# Altium PCB pdb v2.PcbDoc (part 1 of 2)
Units mm, origin at the board's own origin, x right, y up, seen from the top; angles counter-clockwise.
Board outline 131 x 84.21 mm, 4 copper layers (Top Layer, GND, PWR, Bottom Layer); 111 components, 116 nets, 518 pads, 333 vias.
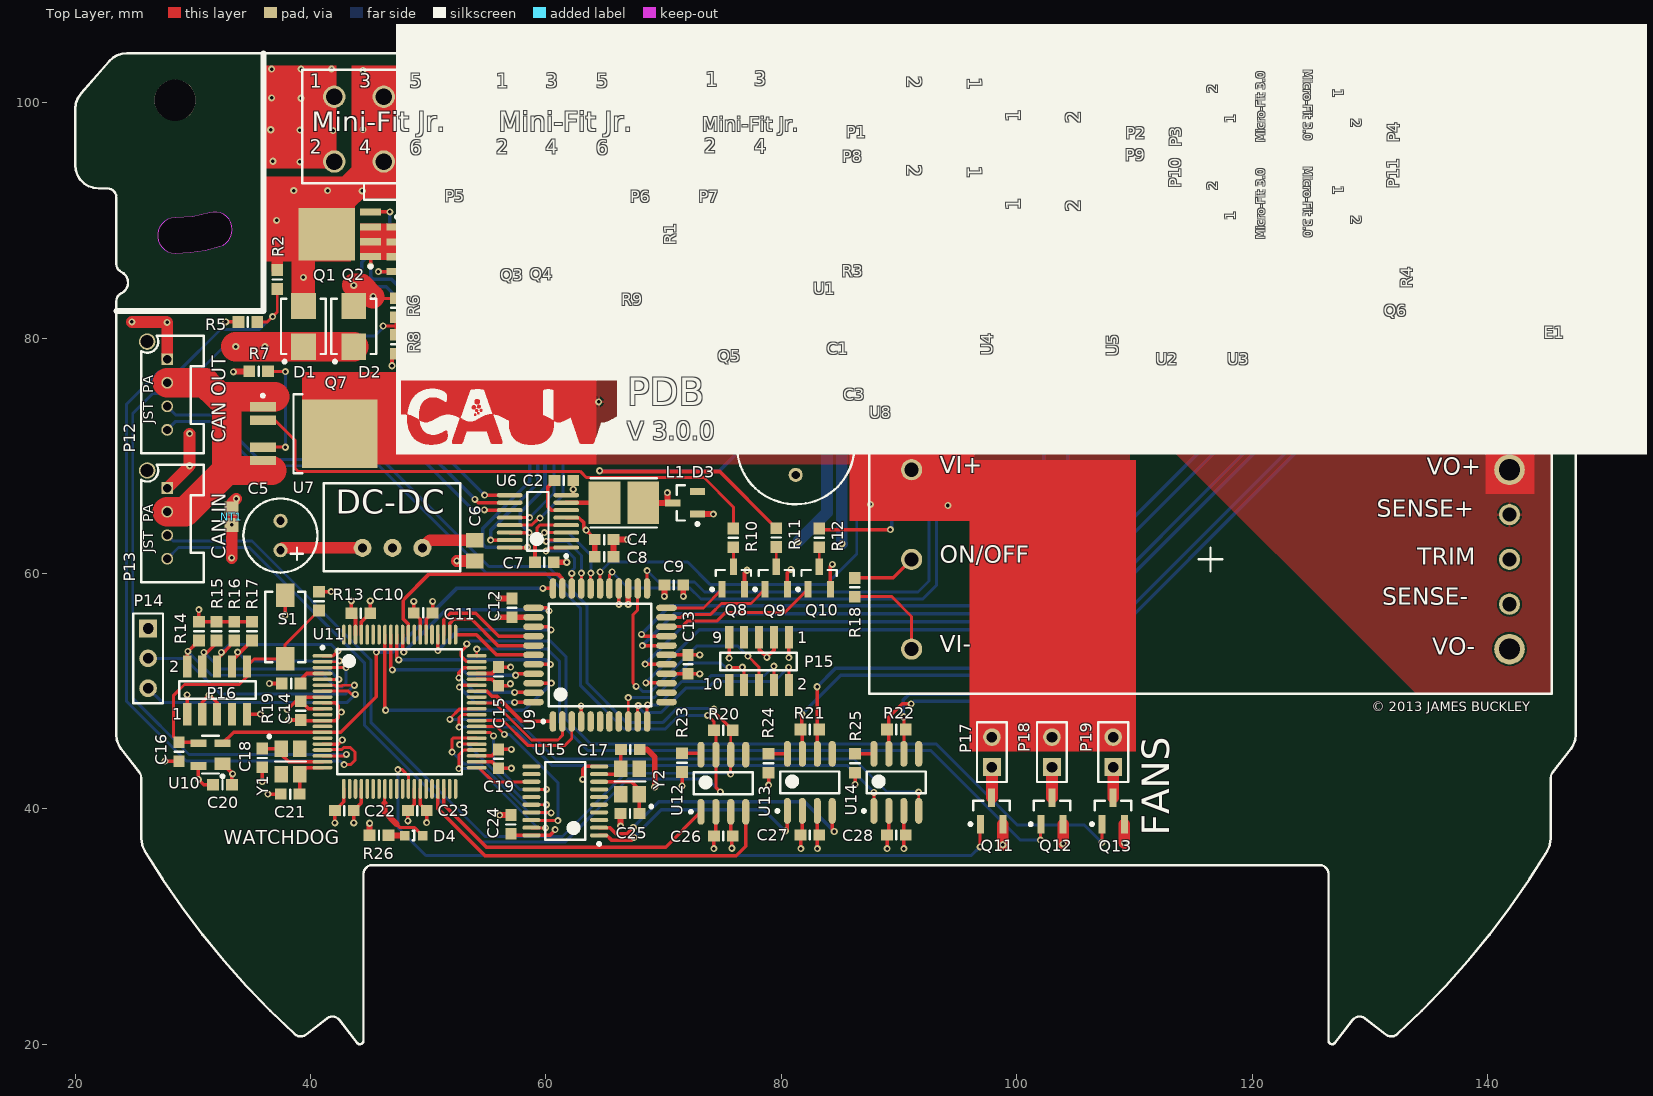
[diagram p0: Top Layer view]
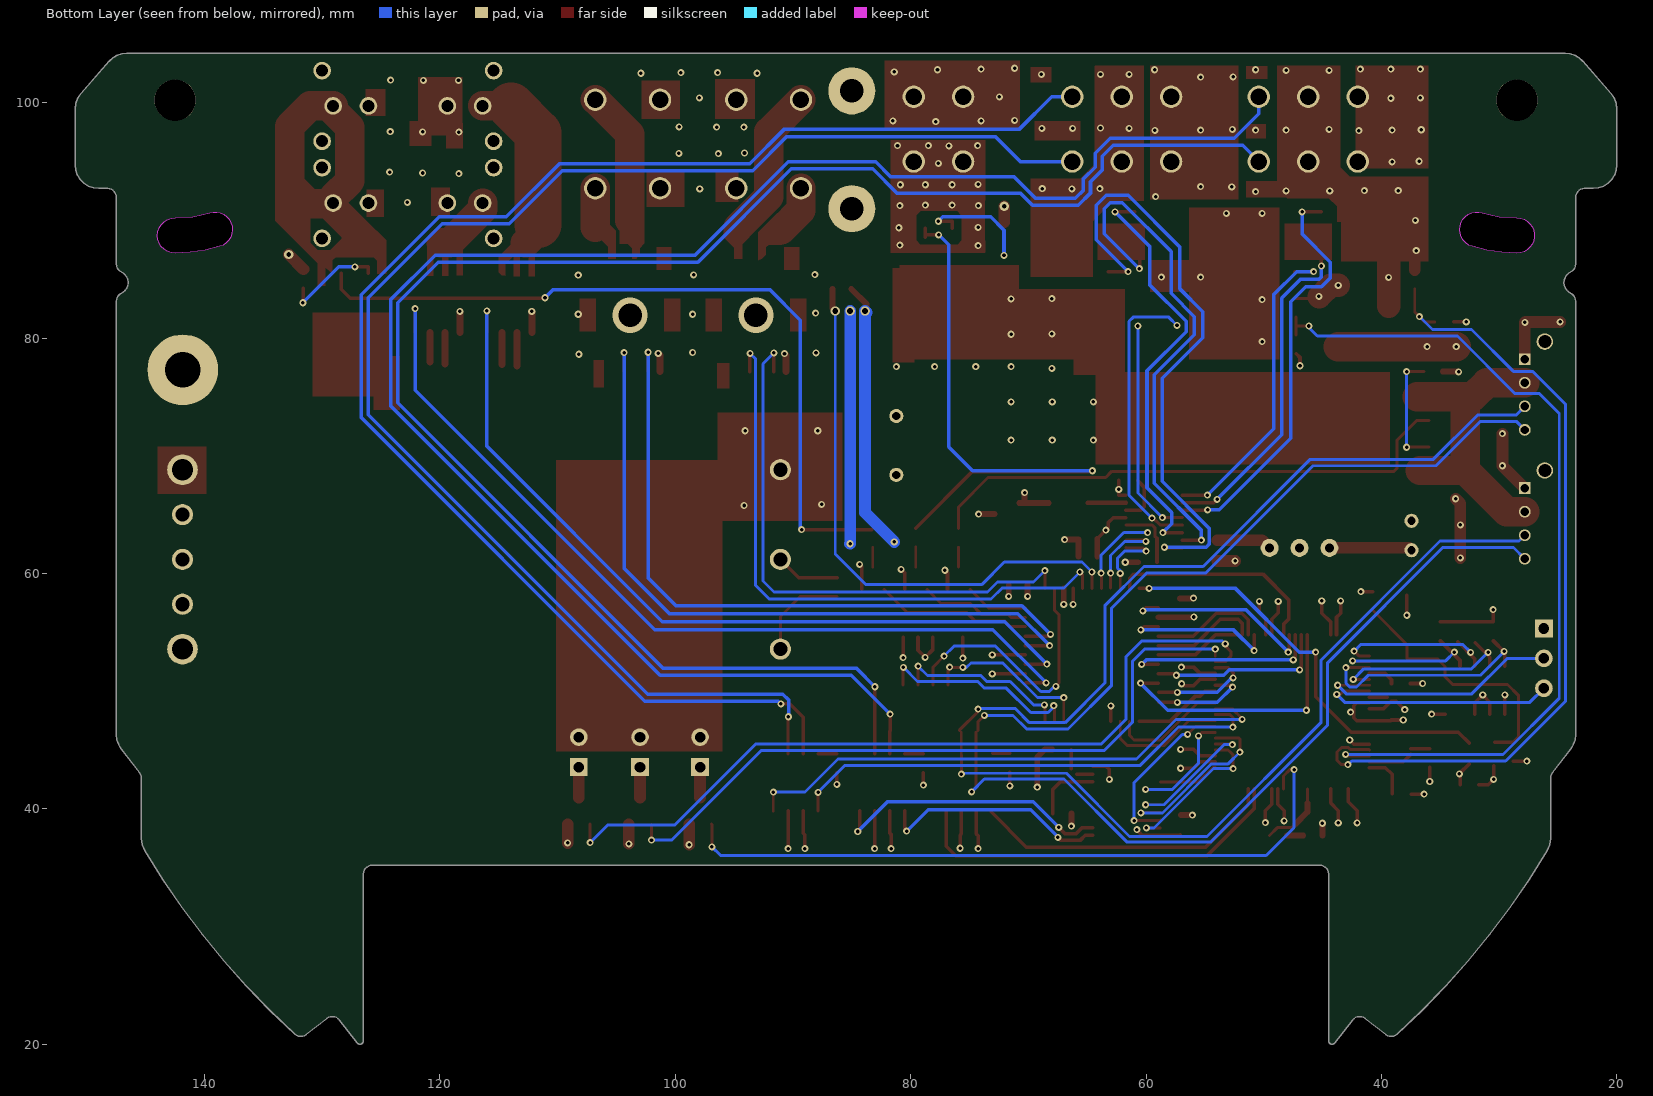
[diagram p1: Bottom Layer view, seen from below]
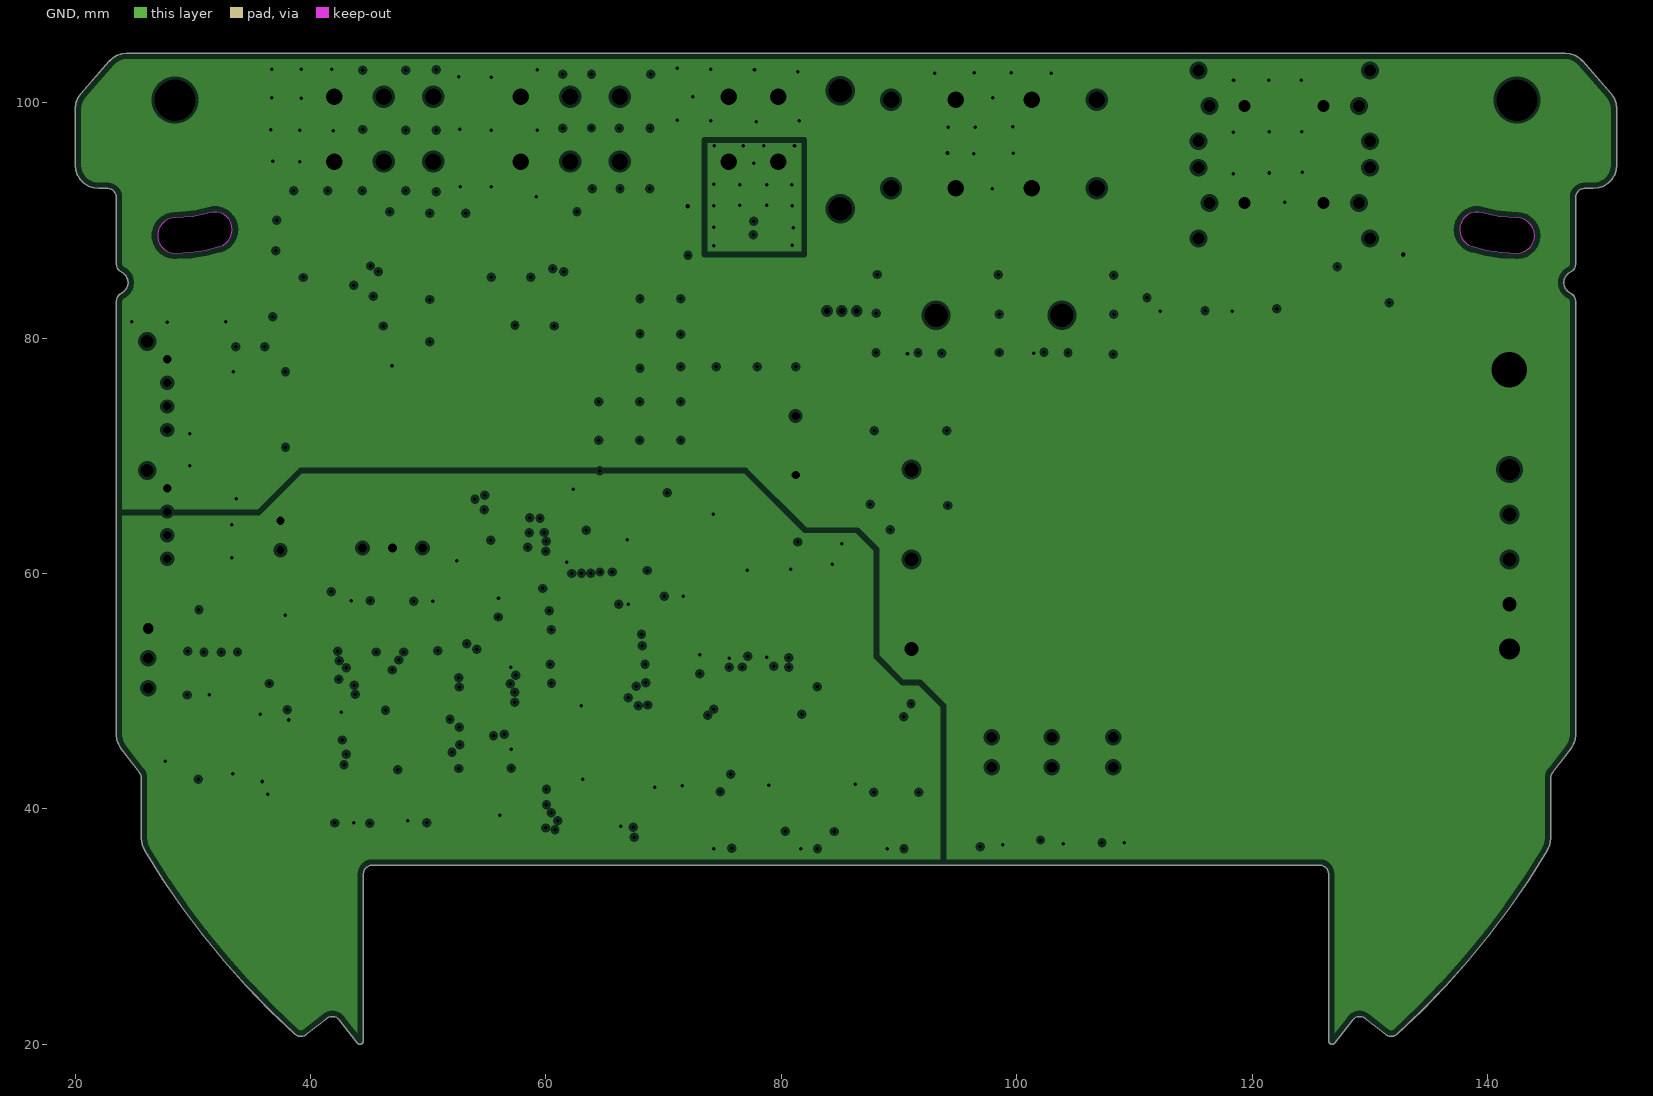
[diagram p2: GND, clearances drawn from the general rule]
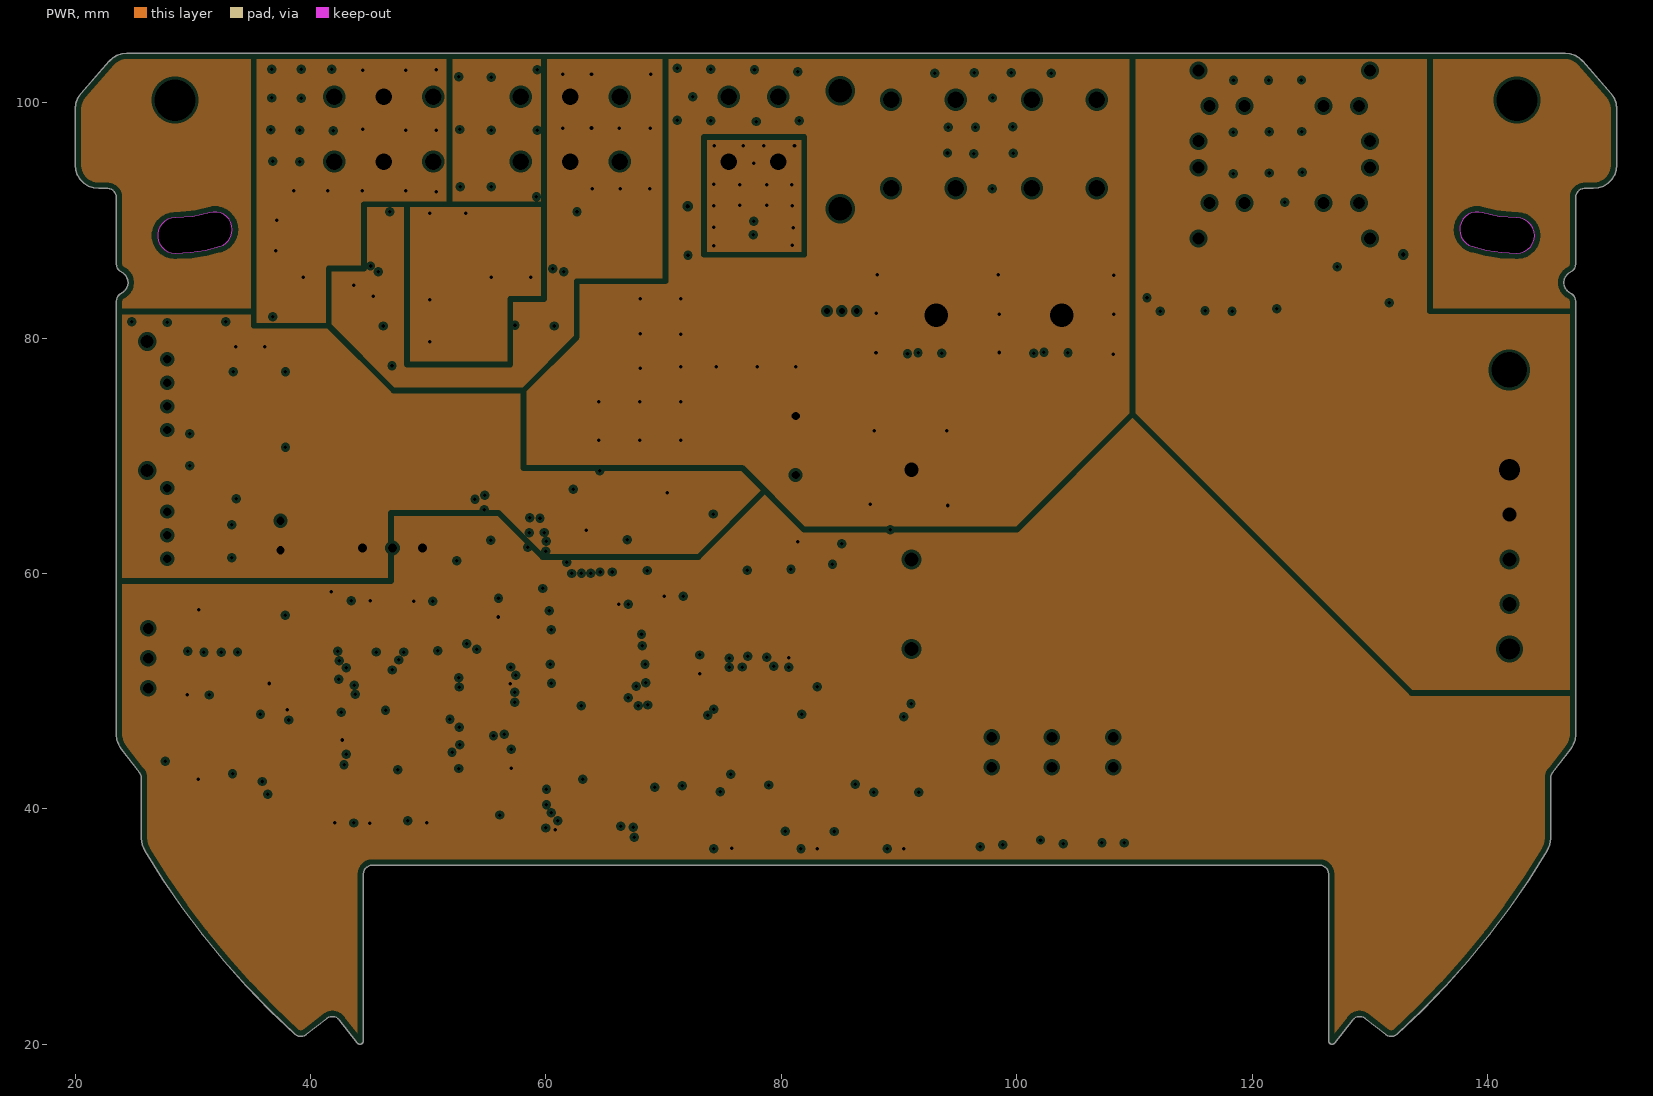
[diagram p3: PWR, clearances drawn from the general rule]

## Layer stack, top to bottom
Top Layer: signal copper 0.0356
Dielectric: core 0.32, FR-4, Dk 4.8
GND: plane copper 0.0356, net (Multiple Nets)
Dielectric: prepreg 0.32, FR-4, Dk 4.8
PWR: plane copper 0.0356, net (Multiple Nets)
Dielectric: core 0.32, FR-4, Dk 4.8
Bottom Layer: signal copper 0.0356

## Board outline
22.902,103.53 23.215,103.818 23.581,104.034 23.985,104.167 24.408,104.213 146.592,104.213 147.015,104.167 147.419,104.034 147.785,103.818 148.098,103.53 150.505,100.778 150.775,100.383 150.943,99.936 151,99.461 151,94.713 150.95,94.268 150.802,93.845 150.564,93.466 150.247,93.149 149.868,92.911 149.445,92.763 149,92.713 148.25,92.713 148.083,92.694 147.925,92.638 147.782,92.549 147.664,92.43 147.574,92.288 147.519,92.13 147.5,91.963 147.5,86.294 147.481,86.126 147.425,85.967 147.335,85.824 147.215,85.705 147.071,85.616 146.896,85.51 146.747,85.37 146.629,85.203 146.547,85.015 146.505,84.815 146.505,84.61 146.547,84.41 146.629,84.222 146.747,84.055 146.896,83.915 147.071,83.809 147.215,83.72 147.335,83.601 147.425,83.459 147.481,83.299 147.5,83.132 147.5,46.308 147.452,45.871 147.31,45.456 147.08,45.082 145.535,43.091 145.449,42.95 145.396,42.795 145.378,42.631 145.378,37.48 145.305,36.946 145.093,36.45 143.556,34.005 141.918,31.626 140.183,29.318 138.354,27.083 136.433,24.926 134.425,22.85 132.332,20.86 132.19,20.759 132.028,20.692 131.856,20.665 131.682,20.679 131.516,20.732 131.366,20.822 129.599,22.193 129.455,22.281 129.296,22.334 129.129,22.351 128.962,22.33 128.805,22.272 128.664,22.181 128.546,22.061 127.037,20.115 126.994,20.07 126.943,20.035 126.886,20.012 126.825,20 126.763,20.001 126.703,20.015 126.647,20.041 126.597,20.078 126.556,20.125 126.525,20.178 126.506,20.237 126.5,20.299 126.5,34.463 126.481,34.63 126.426,34.788 126.336,34.93 126.218,35.049 126.075,35.138 125.917,35.194 125.75,35.213 45.25,35.213 45.083,35.194 44.925,35.138 44.782,35.049 44.664,34.93 44.574,34.788 44.519,34.63 44.5,34.463 44.5,20.299 44.494,20.237 44.475,20.178 44.444,20.125 44.403,20.078 44.353,20.041 44.297,20.015 44.237,20.001 44.175,20 44.114,20.012 44.057,20.035 44.006,20.07 43.963,20.115 42.453,22.061 42.336,22.181 42.195,22.272 42.038,22.33 41.871,22.351 41.704,22.334 41.545,22.281 41.401,22.193 39.634,20.822 39.484,20.732 39.318,20.679 39.144,20.665 38.972,20.692 38.81,20.759 38.668,20.86 36.575,22.85 34.567,24.926 32.646,27.083 30.817,29.318 29.082,31.626 27.444,34.005 25.907,36.45 25.695,36.946 25.622,37.48 25.622,42.631 25.604,42.795 25.551,42.95 25.465,43.091 23.92,45.082 23.69,45.456 23.548,45.871 23.5,46.308 23.5,83.132 23.519,83.299 23.575,83.459 23.665,83.601 23.785,83.72 23.929,83.809 24.12,83.928 24.28,84.086 24.4,84.277 24.475,84.489 24.5,84.713 24.475,84.936 24.4,85.149 24.28,85.339 24.12,85.497 23.929,85.616 23.785,85.705 23.665,85.824 23.575,85.967 23.519,86.126 23.5,86.294 23.5,91.963 23.481,92.13 23.426,92.288 23.336,92.43 23.218,92.549 23.075,92.638 22.917,92.694 22.75,92.713 22,92.713 21.555,92.763 21.132,92.911 20.753,93.149 20.436,93.466 20.198,93.845 20.05,94.268 20,94.713 20,99.461 20.057,99.936 20.225,100.383 20.495,100.778
cut-out: 28.5,90.213 28.188,90.18 27.89,90.083 27.618,89.926 27.385,89.716 27.201,89.463 27.073,89.176 27.008,88.869 27.008,88.556 27.073,88.249 27.201,87.963 27.385,87.709 27.618,87.499 27.89,87.342 28.188,87.245 28.5,87.213 29.784,87.276 31.055,87.466 32.301,87.781 32.593,87.905 32.853,88.089 33.068,88.323 33.229,88.597 33.329,88.899 33.362,89.215 33.33,89.524 33.235,89.82 33.081,90.09 32.875,90.322 32.625,90.507 32.342,90.636 32.039,90.705 31.729,90.709 31.424,90.65 29.978,90.323
cut-out: 142.5,87.213 142.834,87.25 143.151,87.361 143.435,87.54 143.673,87.777 143.851,88.062 143.962,88.379 144,88.713 143.962,89.046 143.851,89.363 143.673,89.648 143.435,89.885 143.151,90.064 142.834,90.175 142.5,90.213 141.022,90.323 139.576,90.65 139.268,90.709 138.955,90.704 138.649,90.633 138.365,90.501 138.115,90.312 137.909,90.076 137.757,89.801 137.665,89.501 137.638,89.189 137.676,88.878 137.778,88.581 137.94,88.312 138.154,88.083 138.41,87.903 138.699,87.781 139.945,87.466 141.216,87.276

## Design rules (kind name [scope] priority, off if disabled: settings)
Clearance [All] p1: gap=0.15
ComponentClearance [All] p1: gap=0.25 collisioncheckmode=3 verticalgap=0.25 showdistances=FALSE
DiffPairsRouting [All] p1: maxlimit=0.3 minlimit=0.2 mostfreqgap=0.26 maxuncoupledlength=12.7
HoleSize [All] p1: absolutevalues=TRUE maxlimit=10 minlimit=0.2 maxpercent=80.000 minpercent=20.000
HoleToHoleClearance [All] p1: gap=0.25 allowstackedmicrovias=TRUE
MinimumAnnularRing [All] p1: minimumring=0.15
MinimumSolderMaskSliver [All] p1: minsoldermaskwidth=0.125
PlaneClearance [All] p1: clearance=0.25
PlaneConnect SpeedController [InNet('NetP9_2')] p1: planeconnectstyle=Direct reliefexpansion=0.508 reliefentries=4 reliefconductorwidth=0.254 reliefairgap=0.254
PlaneConnect [All] p2: planeconnectstyle=Relief reliefexpansion=0.5 reliefentries=4 reliefconductorwidth=0.25 reliefairgap=0.25
PolygonConnect [All] p1: connectstyle=Relief reliefconductorwidth=0.25 reliefentries=4 polygonreliefangle="90 Angle"
RoutingVias [All] p1: holewidth=0.3 width=0.6 viastyle="Through Hole" minholewidth=0.3 minwidth=0.6 maxholewidth=0.4 maxwidth=0.8
SilkToSilkClearance [All] p1: silktosilkclearance=0.25
SilkscreenOverComponentPads [All] p1: minsilkscreentomaskgap=0.125
SolderMaskExpansion ViaCovering [(IsVia)] p1: expansion=-10
SolderMaskExpansion [All] p2: expansion=0.125
Width Power [InNetClass('Power')] p1: maxlimit=10 minlimit=0.25 preferedwidth=0.5
Width General [All] p2: maxlimit=10 minlimit=0.2 preferedwidth=0.25
19 further rules are at their usual default settings.

## Classes and differential pairs
component class U_logic: P17 P18 P19 Q11 Q12 Q13 S1
component class U_3: C5 C6 U7
component class "U_5V psu": C3 R18 U8
component class U_41: C27 R24 U13
component class U_42: C26 R23 U12
component class "U_ARM JTAG Header (vertical)": P16 R13 R14 R15 R16 R17
component class "U_battery conn1": P5 R21
component class "U_battery conn2": P6 R22
component class "U_can connector": P12 P13 R20
component class U_cpld: C9 C12 C13 U9
component class "U_dual output controller1": U5
component class "U_dual output controller2": U4 U5
component class "U_emergency stop": C1 R3 U1
component class "U_input power switching": C2 C4 C7 C8 D1 D2 D3 L1 Q1 Q2 Q3 Q4 R2 R5 R6 R8 R9 R13 R17 U6
component class "U_low voltage output controller1": U3
component class "U_low voltage output controller2": U2
component class U_MCU_POWER: C10 C11 C14 C15 C18 C19 C21 C22 C23 R19 Y1
component class U_mcu: D4 P14 R26 U11
component class "U_output controller1": Q6 Q10 R4 R12
component class "U_output controller2": Q7 Q8 R7 R10
component class "U_output controller3": Q5 Q9 R1 R11
component class U_outputs: P1 P2 P3 P4 P7 P8 P9 P10 P11
component class "U_Reset Supervisor": C16 C20 U10
component class "U_spi can controller": C17 C24 C25 U15 Y2
component class "U_Xilinx JTAG Header": P15
net class CPLD[13..0]: CPLD0 CPLD1 CPLD2 CPLD3 CPLD4 CPLD5 CPLD6 CPLD7 CPLD8 CPLD9 CPLD10 CPLD11 CPLD12 CPLD13
net class EN[1..9]: EN1 EN2 EN3 EN4 EN5 EN6 EN7 EN8 EN9
net class Power: +3.3 GND NetC5_1
channel class "3.3V CAN Transciever": U_3 U_41 U_42
channel class "battery conn": "U_battery conn1" "U_battery conn2"
channel class "dual output controller": "U_dual output controller1" "U_dual output controller2"
channel class "low voltage output controller": "U_low voltage output controller1" "U_low voltage output controller2"
channel class "output controller": "U_output controller1" "U_output controller2" "U_output controller3"
component class pdb: E1 NT1

## Components (designator, comment, footprint, x,y, rotation, side; value= is the part's Value field where it differs from the comment)
C1 "Cap" C0603 84.55,80.6 r0 top (schematic designator C8)
C2 "Cap" C0603 61.525,67.9 r180 top
C3 "Cap Pol1" EEUFR1J101 81.225,68.375 r90 top (schematic designator C4)
C4 "Cap" C0603 64.95,62.875 r180 top (schematic designator C39)
C5 "Cap Pol1" ECEA1VKS220 37.45,64.475 r270 top (schematic designator C2)
C6 "Cap Pol1" C0805 53.95,61.925 r270 top (schematic designator C1)
C7 "Cap" C0603 59.875,60.95 r180 top (schematic designator C3)
C8 "Cap" C0603 64.95,61.425 r180 top (schematic designator C1)
C9 "Cap" C0603 70.875,59.025 r0 top (schematic designator C6)
C10 "Cap" C0603 44.275,56.625 r180 top (schematic designator C24)
C11 "Cap" C0603 49.575,56.65 r0 top (schematic designator C18)
C12 "Cap" C0603 57.125,57.075 r90 top (schematic designator C7)
C13 "Cap" C0603 72.075,52.275 r90 top (schematic designator C5)
C14 "Cap" C0603 39.175,48.35 r270 top (schematic designator C25)
C15 "Cap" C0603 55.975,51.25 r90 top (schematic designator C23)
C16 "Cap" C0603 28.825,44.85 r270 top (schematic designator C2)
C17 "Cap" C0603 67.175,45.05 r0 top (schematic designator C13)
C18 "Cap" C0603 35.9,44.325 r270 top (schematic designator C21)
C19 "Cap" C0603 55.975,44.25 r90 top (schematic designator C22)
C20 "Cap" C0603 32.525,42.05 r0 top (schematic designator C1)
C21 "Cap" C0603 38.275,41.25 r180 top (schematic designator C20)
C22 "Cap" C0603 42.875,39.85 r0 top (schematic designator C19)
C23 "Cap" C0603 49.075,39.85 r180 top (schematic designator C17)
C24 "Cap" C0603 57.025,38.675 r90 top (schematic designator C12)
C25 "Cap" C0603 67.15,39.6 r180 top (schematic designator C14)
C26 "Cap" C0603 75.075,37.7 r180 top (schematic designator C1)
C27 "Cap" C0603 82.425,37.775 r180 top (schematic designator C1)
C28 "Cap" C0603 89.775,37.775 r180 top (schematic designator C1)
D1 "Diode" VS-10BQ030TRPBF 39.4,81 r90 top (schematic designator D2)
D2 "Diode" VS-10BQ030TRPBF 43.675,81 r90 top (schematic designator D1)
D3 "Diode" MMBD914LT1G 71.825,66 r180 top (schematic designator D4)
D4 "" LGQ971 48.025,37.725 r0 top (schematic designator D5)
E1 "EARTH_TAG" EARTH_TAG 141.85,77.3 r0 top
L1 "Inductor" 744045102 66.625,66 r180 top
NT1 "Net Tie" NetTie 33.3,64.325 r90 top net-tie
P1 "Header 2" 39-28-1023 89.325,100.25 r270 top (schematic designator P8)
P2 "Header 2" 39-28-1023 106.8,100.25 r90 top
P3 "Header 2" 43045-0212 119.375,99.725 r90 top (schematic designator P10)
P4 "Header 2" 43045-0212 126.075,99.725 r270 top (schematic designator P3)
P5 "Header 3X2" 39-28-1063 42.025,100.5 r0 top (schematic designator P9)
P6 "Header 3X2" 39-28-1063 57.875,100.5 r0 top (schematic designator P9)
P7 "Header 2X2" 39-28-1043 75.55,100.5 r0 top (schematic designator P1)
P8 "Header 2" 39-28-1023 89.325,92.725 r270 top (schematic designator P6)
P9 "Header 2" 39-28-1023 106.8,92.725 r90 top (schematic designator P4)
P10 "Header 2" 43045-0212 119.375,91.475 r90 top (schematic designator P5)
P11 "Header 2" 43045-0212 126.075,91.475 r270 top (schematic designator P7)
P12 "Header 4" B04B-PASK-1 27.825,72.2 r90 top
P13 "Header 4" B04B-PASK-1 27.825,61.25 r90 top (schematic designator P11)
P14 "Header 3" HDR1X3 26.2,55.325 r270 top (schematic designator P13)
P15 "Header 5X2" FTSH-105-01-L-DV 74.925,55.475 r270 top (schematic designator P1)
P16 "Header 5X2" FTSH-105-01-L-DV 35.25,47.15 r90 top (schematic designator P1)
P17 "Header 2" HDR1X2 97.9,43.55 r90 top (schematic designator P14)
P18 "Header 2" HDR1X2 103,43.55 r90 top (schematic designator P15)
P19 "Header 2" HDR1X2 108.2,43.55 r90 top (schematic designator P16)
Q1 "PSMN1R7-30YL" PSMN1R7-30YL 42.5,88.82 r180 top (schematic designator Q3)
Q2 "PSMN1R7-30YL" PSMN1R7-30YL 49.95,87.545 r0 top (schematic designator Q4)
Q3 "PSMN1R7-30YL" PSMN1R7-30YL 58.375,88.825 r180 top (schematic designator Q2)
Q4 "PSMN1R7-30YL" PSMN1R7-30YL 65.825,87.55 r0 top (schematic designator Q1)
Q5 "BTS6133D" BTS6133D 77.625,84.6 r270 top
Q6 "BTS6133D" BTS6133D 127.25,80.75 r270 top (schematic designator Q5)
Q7 "BTS6133D" BTS6133D 40.7,71.875 r0 top (schematic designator Q5)
Q8 "MOSFET-N" 2N7002 75.925,59.6 r90 top (schematic designator Q6)
Q9 "MOSFET-N" 2N7002 79.575,59.6 r90 top (schematic designator Q6)
Q10 "MOSFET-N" 2N7002 83.225,59.6 r90 top (schematic designator Q6)
Q11 "MOSFET-N" TSM2306CX 97.875,39.825 r90 top (schematic designator Q7)
Q12 "MOSFET-N" TSM2306CX 103,39.825 r90 top (schematic designator Q8)
Q13 "MOSFET-N" TSM2306CX 108.2,39.825 r90 top (schematic designator Q9)
R1 "Res" R0603 72.05,89.05 r90 top (schematic designator R8)
R2 "Res2" R0603 37.175,84.975 r90 top (schematic designator R3)
R3 "Res" R0603 85.85,84.175 r0 top (schematic designator R9)
R4 "Res" R0603 131.6,85.05 r90 top (schematic designator R8)
R5 "Res" R0603 34.675,81.375 r180 top (schematic designator R6)
R6 "Res2" R0603 47.25,82.575 r90 top (schematic designator R2)
R7 "Res" R0603 35.6,77.175 r180 top (schematic designator R8)
R8 "Res" R0603 47.25,79.475 r270 top (schematic designator R5)
R9 "Res Kelvin" WSR32L000FEA 59.05,81.05 r180 top net-tie (schematic designator R1)
R10 "Res2" R0603 75.925,63.025 r90 top (schematic designator R16)
R11 "Res2" R0603 79.575,63.05 r90 top (schematic designator R16)
R12 "Res2" R0603 83.225,63.025 r90 top (schematic designator R16)
R13 "Res" R0603 40.725,57.65 r90 top (schematic designator R5)
R14 "Res" R0603 30.525,55.1 r90 top (schematic designator R1)
R15 "Res" R0603 32.025,55.1 r90 top (schematic designator R2)
R16 "Res" R0603 33.525,55.1 r90 top (schematic designator R4)
R17 "Res" R0603 35.025,55.1 r90 top (schematic designator R3)
R18 "Res" R0603 86.25,58.825 r270 top (schematic designator R12)
R19 "Res" R0603 38.35,50.65 r180 top (schematic designator R13)
R20 "Res2" R0603 75.075,46.675 r0 top (schematic designator R10)
R21 "Res2" R0603 82.425,46.75 r180 top (schematic designator R11)
R22 "Res2" R0603 89.775,46.75 r180 top (schematic designator R11)
R23 "Res" R0603 71.575,43.925 r90 top (schematic designator R1)
R24 "Res" R0603 78.925,43.875 r90 top (schematic designator R1)
R25 "Res" R0603 86.275,43.875 r90 top (schematic designator R1)
R26 "Res" R0603 45.825,37.75 r180 top (schematic designator R32)
S1 "SW-PB" DTSM-32S-B 37.85,55.45 r270 top
U1 "A1120EUA-T" A1101EUA-T 83.875,82.3 r0 top (schematic designator U3)
U2 "TPS2024D" TPS2024D 114.1,82.9 r90 top (schematic designator U1)
U3 "TPS2024D" TPS2024D 120.2,82.9 r90 top (schematic designator U1)
U4 "ITS5215L" ITS5215L 93.15,81.95 r90 top (schematic designator U1)
U5 "ITS5215L" ITS5215L 103.85,81.95 r90 top (schematic designator U1)
U6 "LTC1473" LTC1473 59.325,64.425 r180 top (schematic designator U1)
U7 "SR10S3V3" SR10S3V3 44.425,62.175 r0 top (schematic designator U1)
U8 "EHHD015A0A41-HZ" EHHD015A0A41-HZ 91.075,53.575 r0 top (schematic designator U5)
U9 "XC9572XL-10VQG44C" VQG44_N 64.6,53.075 r90 top (schematic designator U2)
U10 "STM811" STM811 31.5,44.6 r180 top (schematic designator U1)
U11 "LPC1758" LPC1758FBD80 47.575,48.25 r0 top (schematic designator U4)
U12 "SN65HVD230DR" SN65HVD230DR 75.075,42.175 r90 top (schematic designator U1)
U13 "SN65HVD230DR" SN65HVD230DR 82.425,42.25 r90 top (schematic designator U1)
U14 "SN65HVD230DR" SN65HVD230DR 89.775,42.25 r90 top (schematic designator U1)
U15 "MCP2515" MCP2515 61.65,40.675 r180 top (schematic designator U6)
Y1 "XTAL" C3E-24.000-12-3030-X 37.5,45.125 r270 top (schematic designator Y2)
Y2 "XTAL" C3E-24.000-12-3030-X 67.95,41.225 r90 top (schematic designator Y1)

## Footprints (in the part's own frame and the unit in brackets; to place one, negate y for a bottom-side part, rotate by r counter-clockwise, add the part's x,y. Pads: shape width x height; smd on the part's side, far side on the other; paste and mask are expansions set on the pad)
2N7002 [mm] "N channel MOSFET"
  rect 1.4x0.6 smd: 1(-0.95,0.95) 2(-0.95,-0.95) 3(0.95,0)
  silkscreen extent -1.07,-1.5 0.7,1.92, body extent -0.7,-1.5 0.7,1.5, height 1.1
39-28-1023 [mm] "MOLEX - 39-28-1023 - HEADER, MINI-FIT, 2WAY"
  round 1.9 hole 1.4: 1(0,5.5) 2(0,0)
  silkscreen extent -2.7,-3.3 2.7,7.8, body extent -3.1,-3.25 3.1,7.75, height 12.8
39-28-1043 [mm] "MOLEX - 39-28-1043 - HEADER, MINI-FIT, 4WAY"
  round 1.9 hole 1.4: 1(0,0) 2(0,-5.5) 3(4.2,0) 4(4.2,-5.5)
  silkscreen extent -2.7,-8.75 6.9,2.25, body extent -3.1,-8.75 7.3,2.25, height 12.8
39-28-1063 [mm] "MOLEX - 39-28-1063 - HEADER, MINI-FIT, 6WAY"
  round 1.9 hole 1.4: 1(0,0) 2(0,-5.5) 3(4.2,0) 4(4.2,-5.5) 5(8.4,0) 6(8.4,-5.5)
  silkscreen extent -2.72,-8.75 11.1,2.3, body extent -3.1,-8.75 11.5,2.25, height 12.8
43045-0212 [mm] "MOLEX - 43045-0212 - HEADER, VERTICAL, 2WAY"
  round 1.5 hole 1.02: 1(0,0) 2(0,3) ""(-3,3.94) ""(3,3.94)
  silkscreen extent -3.57,-2.47 3.57,6.27, body extent -3.57,-2.49 3.57,6.28, height 9.95
744045102 [mm] "WUERTH ELEKTRONIK - 744045102 - INDUCTOR, 1812 CASE, 1000µH"
  rect 2.7x3.6 smd: 1(-1.65,0) 2(1.65,0)
  silkscreen extent -2.8,-2.1 2.8,2.1, body extent -2.4,-1.75 2.4,1.75, height 2.9
A1101EUA-T [mm] "ALLEGRO MICROSYSTEMS - A1101EUA-T - HALL EFFECT SWITCH, SIP-3, 1101"
  round 0.8 hole 0.5: 1(0,0) 2(1.27,0) 3(2.54,0)
  silkscreen extent -0.7,-0.7 3.25,0.9, body extent -0.7,-0.72 3.25,0.9, height 3.1
B04B-PASK-1 [mm] "JST (JAPAN SOLDERLESS TERMINALS) - B04B-PASK-1 - HEADER, PA, 4WAY, TOP, 2MM, W/BOSS"
  rect 1x1 hole 0.7: 1(6,0)
  round 1 hole 0.7: 2(4,0) 3(2,0) 4(0,0)
  round 1.4 hole 1.1: ""(7.5,1.7)
  silkscreen extent -2,-3.1 8,2.2, body extent -2,-3.1 8,2.2, height 7.75
BTS6133D [mm] "INFINEON - BTS6133D - IC, PROFET, P-TO252-5"
  rect 2.2x0.8 smd mask+0.18: 1(-4.75,2.28) 2(-4.75,1.14) 4(-4.75,-1.14) 5(-4.75,-2.28)
  rect 6.4x5.8 smd: 6(1.778,0)
  silkscreen extent -4.87,-3.35 -1.4,3.36, body extent -2.15,-3.32 4.07,3.32, height 2.35
C3E-24.000-12-3030-X [mm]
  rect 1.4x1.15 smd: 1(0,0) 2(2.2,1.6) 3(2.2,0) 4(0,1.6)
  silkscreen extent -1.15,-1.12 1.1,2.1, body extent -0.6,-0.5 2.8,2.1, height 0.75
C0603 [mm] "Chip Capacitor, 2-Leads, Body 1.6x0.8mm, IPC Medium Density"
  rect 1x0.95 smd: 1(-0.8,0) 2(0.8,0)
  silkscreen extent 0,-0.38 0,0.38, body extent -0.88,-0.48 0.87,0.48, height 0.8
C0805 [mm] "KEMET - C0805C104K5RACTU - CAPACITOR, 0805, 100NF, 50V, X7R"
  rect 1.25x1.5 smd: 1(-0.889,0) 2(0.861,0)
  body extent -1.12,-0.72 1.09,0.72, height 1
DTSM-32S-B [mm] "MULTICOMP - DTSM-32S-B - TACTILE SWITCH, SPNO, SMD, 50MA"
  rect 2x1.6 smd: 1(-2.7,0) 2(2.7,0)
  silkscreen extent -3,-1.7 3,1.7, body extent -3.67,-1.75 3.67,1.75, height 2.08
EARTH_TAG [mm] "Screw hole for attaching earth tag"
  round 6 hole 3: 1(0,0)
ECEA1VKS220 [mm] "PANASONIC - ECEA1VKS220 - CAPACITOR, RADIAL, 35V, 22UF"
  round 1.2 hole 0.7: 1(2.5,0) 2(0,0)
  silkscreen extent -1.9,-3.15 4.4,3.15, body extent -1.88,-3.14 4.4,3.14, height 5
EEUFR1J101 [mm]
  round 1.2 hole 0.7: 1(5,0) 2(0,0)
  silkscreen extent -2.5,-5 7.5,5, body extent -2.48,-5 7.48,4.98, height 12.6
EHHD015A0A41-HZ [mm] "GE CRITICAL POWER - EHHD015A0A41-HZ - DC DC 5V 15A 1/8 BRICK & HEAT PLATE"
  round 1.8 hole 1.2: 1(0,15.24) 2(0,7.62) 3(0,0) 5(50.8,3.81) 6(50.8,7.62) 7(50.8,11.43)
  round 2.6 hole 1.8: 4(50.8,0) 8(50.8,15.24)
  silkscreen extent -3.6,-3.8 54.4,19.04, body extent -3.6,-3.8 54.4,19, height 12.4
FTSH-105-01-L-DV [mm] "HEADER, 1.27MM, SMD, 10WAY"
  rect 1.9x0.7 smd: 1(0.9,5.725) 2(4.95,5.725) 3(0.9,4.456) 4(4.95,4.456) 5(0.9,3.187) 6(4.95,3.187) 7(0.9,1.919) 8(4.95,1.919) 9(0.9,0.65) 10(4.95,0.65)
  silkscreen extent 2.2,-0.1 3.7,6.4, body extent 0,0 5.84,6.35, height 5.97
HDR1X2 [mm] "Connector; Header; 2 Position"
  rect 1.5x1.5 hole 0.9: 1(0,0)
  round 1.5 hole 0.9: 2(2.54,0)
  silkscreen extent -1.27,-1.27 3.81,1.27
HDR1X3 [mm] "Connector; Header; 3 Position"
  rect 1.5x1.5 hole 0.9: 1(0,0)
  round 1.5 hole 0.9: 2(2.54,0) 3(5.08,0)
  silkscreen extent -1.27,-1.27 6.35,1.27
ITS5215L [mm] "INFINEON - ITS5215L - HIGH SIDE SWITCH, DUAL, NN CH, DSO12"
  oval 2x0.65 smd mask+0.19: 1(-4.8,2.55) 2(-4.8,1.53) 3(-4.8,0.51) 4(-4.8,-0.51) 5(-4.8,-1.53) 6(-4.8,-2.55) 7(4.8,-2.55) 8(4.8,-1.53) 9(4.8,-0.51) 10(4.8,0.51) 11(4.8,1.53) 12(4.8,2.55)
  rect 2.5x1.4 smd: 13(0,3.429) 13(0,-3.429)
  rect 4.7x5.5 smd: 13(0,0)
  silkscreen extent -4.92,-3.3 3.4,3.55, body extent -3.8,-3.25 3.8,3.25, height 2.6
LGQ971 [mm] "OSRAM - LGQ971 - LED, SMD, GREEN"
  rect 0.8x0.8 smd: 1(0,0) 2(1.5,0)
  silkscreen extent 0.65,-0.4 0.8,0.4, body extent 0.02,-0.4 1.42,0.4, height 0.9
LPC1758FBD80 [mm] "LPC1758FBD80"
  oval 1.7x0.3 smd: 1(-6.55,4.75) 2(-6.55,4.25) 3(-6.55,3.75) 4(-6.55,3.25) 5(-6.55,2.75) 6(-6.55,2.25) 7(-6.55,1.75) 8(-6.55,1.25) 9(-6.55,0.75) 10(-6.55,0.25) 11(-6.55,-0.25) 12(-6.55,-0.75) 13(-6.55,-1.25) 14(-6.55,-1.75) 15(-6.55,-2.25) 16(-6.55,-2.75) 17(-6.55,-3.25) 18(-6.55,-3.75) 19(-6.55,-4.25) 20(-6.55,-4.75) 41(6.55,-4.75) 42(6.55,-4.25) 43(6.55,-3.75) 44(6.55,-3.25) 45(6.55,-2.75) 46(6.55,-2.25) 47(6.55,-1.75) 48(6.55,-1.25) 49(6.55,-0.75) 50(6.55,-0.25) 51(6.55,0.25) 52(6.55,0.75) 53(6.55,1.25) 54(6.55,1.75) 55(6.55,2.25) 56(6.55,2.75) 57(6.55,3.25) 58(6.55,3.75) 59(6.55,4.25) 60(6.55,4.75)
  oval 0.3x1.7 smd: 21(-4.75,-6.55) 22(-4.25,-6.55) 23(-3.75,-6.55) 24(-3.25,-6.55) 25(-2.75,-6.55) 26(-2.25,-6.55) 27(-1.75,-6.55) 28(-1.25,-6.55) 29(-0.75,-6.55) 30(-0.25,-6.55) 31(0.25,-6.55) 32(0.75,-6.55) 33(1.25,-6.55) 34(1.75,-6.55) 35(2.25,-6.55) 36(2.75,-6.55) 37(3.25,-6.55) 38(3.75,-6.55) 39(4.25,-6.55) 40(4.75,-6.55) 61(4.75,6.55) 62(4.25,6.55) 63(3.75,6.55) 64(3.25,6.55) 65(2.75,6.55) 66(2.25,6.55) 67(1.75,6.55) 68(1.25,6.55) 69(0.75,6.55) 70(0.25,6.55) 71(-0.25,6.55) 72(-0.75,6.55) 73(-1.25,6.55) 74(-1.75,6.55) 75(-2.25,6.55) 76(-2.75,6.55) 77(-3.25,6.55) 78(-3.75,6.55) 79(-4.25,6.55) 80(-4.75,6.55)
  silkscreen extent -6.67,-5.3 5.3,5.57, body extent -6,-6 6,6, height 1.6
LTC1473 [mm] "LINEAR TECHNOLOGY - LTC1473CGN#PBF - SWITCH DRIVER, SMD, SSOP16, 1473"
  oval 2.2x0.35 smd: 1(-2.4,2.222) 2(-2.4,1.587) 3(-2.4,0.952) 4(-2.4,0.317) 5(-2.4,-0.318) 6(-2.4,-0.953) 7(-2.4,-1.588) 8(-2.4,-2.223) 9(2.4,-2.222) 10(2.4,-1.587) 11(2.4,-0.952) 12(2.4,-0.317) 13(2.4,0.318) 14(2.4,0.953) 15(2.4,1.588) 16(2.4,2.223)
  silkscreen extent -2.53,-2.5 0.9,3.07, body extent -1.99,-2.49 1.99,2.49, height 1.73
MCP2515 [mm] "MICROCHIP - MCP2515-I/ST - CAN CONTROLLER, SMD, 2515, TSSOP20"
  oval 1.55x0.35 smd: 1(-2.875,2.925) 2(-2.875,2.275) 3(-2.875,1.625) 4(-2.875,0.975) 5(-2.875,0.325) 6(-2.875,-0.325) 7(-2.875,-0.975) 8(-2.875,-1.625) 9(-2.875,-2.275) 10(-2.875,-2.925) 11(2.875,-2.925) 12(2.875,-2.275) 13(2.875,-1.625) 14(2.875,-0.975) 15(2.875,-0.325) 16(2.875,0.325) 17(2.875,0.975) 18(2.875,1.625) 19(2.875,2.275) 20(2.875,2.925)
  silkscreen extent -3,-3.3 1.7,3.77, body extent -2.25,-3.3 2.25,3.3, height 1.2
MMBD914LT1G [mm] "ON SEMICONDUCTOR - MMBD914LT1G - DIODE, SIGNAL, 100V, SOT-23"
  rect 1.3x0.6 smd: 1(-1.05,0.95) 2(1.05,0) ""(-1.05,-0.95)
  silkscreen extent -1.18,-1.5 0.7,1.92, body extent -0.7,-1.52 0.7,1.52, height 1.11
NetTie [mm] "Net Tie"
  rect 1.2x1.2 smd: 1(-0.2,0)
  rect 1.2x1.2 smd mask-10: 2(1.2,0)
  Top Layer lines w1: -0.2,0 1.2,0
PSMN1R7-30YL [mm] "NXP - PSMN1R7-30YL - MOSFET, N CH 30V 100A SOT669"
  rect 1.8x0.6 smd: 1(-2.6,1.905) 2(-2.6,0.635) 3(-2.6,-0.635) 4(-2.6,-1.905)
  rect 4.8x4.5 smd: 5(1.1,0)
  silkscreen extent -2.73,2.63 -2.48,2.88, body extent -1.9,-2.5 2.2,2.5, height 1.2
R0603 [mm]
  rect 1x1 smd: 1(-0.8,0) 2(0.8,0)
  silkscreen extent 0,-0.4 0,0.4, body extent -0.85,-0.48 0.85,0.47, height 0.45
SN65HVD230DR [mm] "TEXAS INSTRUMENTS - SN65HVD230DR - TRANSCEIVER CAN, 65HVD230, SOIC8"
  oval 2.2x0.6 smd: 1(-2.425,1.905) 2(-2.425,0.635) 3(-2.425,-0.635) 4(-2.425,-1.905) 5(2.425,-1.905) 6(2.425,-0.635) 7(2.425,0.635) 8(2.425,1.905)
  silkscreen extent -2.55,-2.5 0.93,2.88, body extent -2,-2.5 2,2.5, height 1.75
SR10S3V3 [mil] "XP POWER - SR10S3V3 - SWITCHING REGULATOR, 3.3V, 1A O/P"
  round 60 hole 30: 1(0,0) 2(100,0) 3(200,0)
  silkscreen extent -130,-79 327,217, body extent -130,-79 327,217, height 380
STM811 [mm] "SOT143, 4-Leads, Body 3.0x2.6mm (max), Pitch 1.92mm, IPC Medium Density"
  rect 1.35x1.05 smd: 1(-1.025,0.76)
  rect 1.35x0.65 smd: 2(-1.025,-0.96) 3(1.025,-0.96) 4(1.025,0.96)
  silkscreen extent -1.15,-1.6 0.7,1.96, body extent -0.7,-1.52 0.7,1.52, height 1.12
TPS2024D [mm] "TEXAS INSTRUMENTS - TPS2024D - IC, 3A PWR DIST SWITCH 8-SOIC"
  oval 2.2x0.6 smd: 1(-2.425,1.905) 2(-2.425,0.635) 3(-2.425,-0.635) 4(-2.425,-1.905) 5(2.425,-1.905) 6(2.425,-0.635) 7(2.425,0.635) 8(2.425,1.905)
  silkscreen extent -2.55,-2.5 0.93,2.88, body extent -2,-2.5 2,2.5, height 1.75
TSM2306CX [mm] "TAIWAN SEMICONDUCTOR - TSM2306CX - MOSFET,N CH,30V,3.5A,SOT23"
  rect 1.55x0.6 smd: 1(1.125,0) 2(-1.125,0.95) 3(-1.125,-0.95)
  silkscreen extent -1.25,-1.55 0.85,1.92, body extent -0.85,-1.55 0.85,1.55, height 1.3
VQG44_N [mm] "Thin QFP, 44-Leads, Body 10x10mm, Pitch 0.8mm, IPC Medium Density"
  oval 1.75x0.55 smd: 1(-5.65,4) 2(-5.65,3.2) 3(-5.65,2.4) 4(-5.65,1.6) 5(-5.65,0.8) 6(-5.65,0) 7(-5.65,-0.8) 8(-5.65,-1.6) 9(-5.65,-2.4) 10(-5.65,-3.2) 11(-5.65,-4) 23(5.65,-4) 24(5.65,-3.2) 25(5.65,-2.4) 26(5.65,-1.6) 27(5.65,-0.8) 28(5.65,0) 29(5.65,0.8) 30(5.65,1.6) 31(5.65,2.4) 32(5.65,3.2) 33(5.65,4)
  oval 0.55x1.75 smd: 12(-4,-5.65) 13(-3.2,-5.65) 14(-2.4,-5.65) 15(-1.6,-5.65) 16(-0.8,-5.65) 17(0,-5.65) 18(0.8,-5.65) 19(1.6,-5.65) 20(2.4,-5.65) 21(3.2,-5.65) 22(4,-5.65) 34(4,5.65) 35(3.2,5.65) 36(2.4,5.65) 37(1.6,5.65) 38(0.8,5.65) 39(0,5.65) 40(-0.8,5.65) 41(-1.6,5.65) 42(-2.4,5.65) 43(-3.2,5.65) 44(-4,5.65)
  silkscreen extent -5.77,-4.35 4.35,4.95, body extent -5,-5 5,5, height 1.2
VS-10BQ030TRPBF [mm] "VISHAY FORMERLY I.R. - VS-10BQ030TRPBF - DIODE, SCHOTTKY, 1A, 30V"
  rect 2.25x2.1 smd: 1(1.725,0) 2(-1.725,0)
  silkscreen extent -3.12,-1.9 2.35,1.9, body extent -2.35,-1.9 2.35,1.9, height 2.4
WSR32L000FEA [mm] "VISHAY DALE - WSR32L000FEA - RESISTOR, METAL STRIP, 0.002 OHM 1%"
  rect 4.1x5.75 smd: 1(-4.7,0) 2(4.7,0)
  rect 1x0.5 smd: 3(-2.159,0) 4(2.159,0)
  silkscreen extent -2.25,-2.77 2.25,2.78, body extent -6.19,-2.79 6.18,2.8, height 2.53

## Part data
C1 C2 C4 C7 C8 C9 C10 C11 C12 C13 C14 C15 C16 C17 C18 C19 C20 C21 C22 C23 C24 C25 C26 C27 C28: "Capacitor"
C3 C5 C6: "Polarized Capacitor (Radial)"
D1 D2 D3: "Default Diode"
D4: library part LED2, "Typical RED, GREEN, YELLOW, AMBER GaAs LED"
NT1: library part NetTie
P1 P2 P3 P4 P8 P9 P10 P11 P17 P18 P19: "Header, 2-Pin"
P5 P6: "Header, 3-Pin, Dual row"
P7: "Header, 2-Pin, Dual row"
P12 P13: "Header, 4-Pin"
P14: "Header, 3-Pin"
P15 P16: "Header, 5-Pin, Dual row"
Q1 Q2 Q3 Q4: "NXP - PSMN1R7-30YL - MOSFET, N CH 30V 100A SOT669"
Q5 Q6 Q7: "INFINEON - BTS6133D - IC, PROFET, P-TO252-5"
Q8 Q9 Q10 Q11 Q12 Q13: "N-Channel MOSFET"
R1 R3 R4 R5 R7 R8 R13 R14 R15 R16 R17 R18 R19 R23 R24 R25 R26: library part Res2, "Resistor"
R2 R6 R10 R11 R12 R20 R21 R22: "Resistor"
R9: "Resistor Kelvin"
S1: "Switch"
U1: "ALLEGRO MICROSYSTEMS - A1120EUA-T - HALL EFFECT SWITCH, UNIPOLAR, 3SIP"
U2 U3: "TEXAS INSTRUMENTS - TPS2024D - IC, 3A PWR DIST SWITCH 8-SOIC"
U4 U5: "INFINEON - ITS5215L - HIGH SIDE SWITCH, DUAL, NN CH, DSO12"
U6: "IC SWITCH DVR PWRPATH DUAL16SSOP"
U7: "XP POWER - SR10S3V3 - SWITCHING REGULATOR, 3.3V, 1A O/P"
U8: "GE CRITICAL POWER - EHHD015A0A41-HZ - DC DC 5V 15A 1/8 BRICK & HEAT PLATE"
U9: "FastFLASH XC900XL, 3.3V High-Performance CPLD with 72 Macrocells, 44-Pin VQFP, Commercial Grade, Pb-Free"
U10: "STMICROELECTRONICS - STM811TW16F - MPU LOW RESET 3.08V, SOT-143-4, 811"
U11: "NXP - LPC1758FBD80 - MCU, 32BIT, ARM CORTEX M3, 80LQFP"
U12 U13 U14: "TEXAS INSTRUMENTS - SN65HVD230DR - TRANSCEIVER CAN, 65HVD230, SOIC8"
U15: "MICROCHIP - MCP2515-I/ST - CAN CONTROLLER, SMD, 2515, TSSOP20"
Y1 Y2: "Crystal Oscillator"

## Free pads (board coordinates)
  round 3.5 hole 3.5: 1(28.5,100.213) 1(142.5,100.213)
  round 4 hole 2: ""(85,91) ""(85,101)

## Via types
v1: diameter 0.6, hole 0.3, Top Layer to Bottom Layer, 329 vias
v2: diameter 0.8, hole 0.4, Top Layer to Bottom Layer, 2 vias
v3: diameter 3, hole 2, Top Layer to Bottom Layer, 2 vias

## Nets (pads, with @x,y where several pads share a name; then routed paths per layer and width w, separated by ;. In a path a pad name is that pad's centre, name@x,y a point inside that pad or via, vN(x,y) a via of type N, cw(c..) or ccw(c..) an arc to the next point about the centre after c; other vN are vias at no path point)
+3.3: C1.1 C6.1 C9.1 C10.1 C11.1 C12.1 C13.1 C14.1 C15.1 C19.1 C20.1 C22.1 C23.1 C24.1 C26.1 C27.1 C28.1 P15.1 P16.1 R3.1 R13.2 R14.2 R15.2 R16.2 R17.2 R19.2 R26.2 U1.1 U7.3 U9.15 U9.26 U9.35 U10.4 U11.8 U11.10 U11.16 U11.21 U11.34 U11.42 U11.56 U11.67 U11.77 U12.3 U13.3 U14.3 U15.20 | length 91.7
  Top Layer w0.3: P16.1@29.525,48.05 v1(29.525,49.675) ; U10.4@30.475,43.64 v1(30.475,42.5) 30.925,42.05 C20.1@31.725,42.05 ; v1(30.525,56.925) R14.2@30.525,55.9 R16.2@33.525,55.9 R17.2@35.025,55.9 ; v1(36.5,50.65) R19.2@37.55,50.65 ; v1(38.025,48.425) 38.75,49.15 C14.1@39.175,49.15 39.825,48.5 U11.10@41.025,48.5 ; C14.1@39.525,49.5 U11.8@41.025,49.5 ; R13.2@40.725,58.45 v1(41.75,58.45) ; U11.16@41.025,45.5 42.35,45.5 v1(42.7,45.85) ; v1(42.075,38.8) C22.1@42.075,39.85 42.825,40.6 U11.21@42.825,41.7 ; U11.77@44.325,54.8 44.325,55.875 C10.1@45.075,56.625 v1(45.075,57.675) ; v1(48.775,57.625) C11.1@48.775,56.65 49.325,56.1 U11.67@49.325,54.8 ; U11.34@49.325,41.7 49.325,40.4 C23.1@49.875,39.85 v1(49.875,38.825) ; U11.42@54.125,44 55.425,44 C19.1@55.975,43.45 v1(57.075,43.45) ; U11.56@54.125,51 55.425,51 C15.1@55.975,50.45 56.85,50.45 56.978,50.578 v1(56.978,50.627) ; C24.1@57.1,37.8 57.15,37.75 U15.20@58.775,37.75 60.35,37.75 60.778,38.178 v1(60.778,38.227) ; v1(66.2,57.375) U9.26@66.2,58.725 ; U9.15@70.25,51.475 v1(73.075,51.475) ; U12.3@75.71,39.75 75.71,37.865 75.8,37.775 v1(75.8,36.65) ; v1(80.65,52.85) P15.1@80.65,54.575 ; U13.3@83.06,39.825 83.06,36.64 v1(83.075,36.625) ; U14.3@90.41,39.825 90.41,36.64 v1(90.425,36.625)
  Top Layer w0.5: R26.2@45.025,37.75 v1(45.025,38.775) ; v1(55.95,56.3) 55.975,56.275 U9.35@58.95,56.275 ; v1(70.075,58.05) C9.1@70.075,59.025 ; C1.1@83.75,80.6 83.75,82.875 R3.1@85.05,84.175
  Top Layer w1: U7.3@49.505,62.175 50.144,62.814 C6.1@53.95,62.814
  Bottom Layer w0.3: v1(56.978,50.627) v1@57,50.65
  Bottom Layer w1: v1(81.4,62.675) 83.875,65.15 U1.1@83.875,82.3 U1.1@83.75,82.175
+P5: Q6.6 U2.2 U2.3 U3.2 U3.3 U8.7 U8.8 | length 10.7
  Top Layer w0.6: 113.465,77.64 U2.2@113.465,80.475 ; 114.735,77.76 U2.3@114.735,80.475 ; 119.565,77.815 U3.2@119.565,80.475 ; 120.835,77.99 U3.3@120.835,80.475
+PBAT: C3.1 P17.2 P18.2 P19.2 Q5.6 Q7.6 R9.1 U4.6 U4.12 U4.13 U5.6 U5.12 U5.13 U8.1
  other v1: 94.15,65.775 87.575,65.875 64.475,71.325 67.975,71.325 71.475,71.325 87.9,72.125 94.075,72.125 64.475,74.575 67.975,74.575 71.475,74.575 68,77.425 71.475,77.575 74.475,77.575 77.975,77.575 81.225,77.575 108.2,78.625 88.05,78.75 98.525,78.775 71.475,80.325 68,80.35 98.525,82.025 108.25,82.025 88.075,82.125 68,83.35 71.475,83.325 108.25,85.35 98.45,85.375 88.15,85.4
  other v3: 93.15,81.95 103.85,81.95
B\R\D\_\R\S\T\: U9.33 U10.2 U11.14 | length 35.8
  Top Layer w0.3: U10.2@32.525,45.56 33.465,46.5 U11.14@41.025,46.5 42.575,46.5 45.6,49.525 v1(45.6,53.325) ; v1(59.75,58.725) U9.33@60.6,58.725
  Bottom Layer w0.3: v1(45.6,53.325) 45.623,53.302 46.977,53.302 52.4,58.725 v1(59.75,58.725)
"CAN_H_U_battery conn1": P5.5 R21.2 U13.7 | length 151.3
  Top Layer w0.3: v1(81.75,48.05) 81.75,46.625 81.79,46.585 U13.7@81.79,44.675
  Bottom Layer w0.3: P5.5@50.425,100.5 50.425,99.05 52.5,96.975 63.049,96.975 64.325,95.699 64.325,94.524 65.325,93.524 65.325,92.575 66.026,91.874 69.401,91.874 71.251,93.725 81.726,93.725 82.976,94.975 90.4,94.975 98.325,87.05 120.399,87.05 124.2,83.249 124.2,74.251 101.299,51.35 85.05,51.35 v1(81.75,48.05)
"CAN_H_U_battery conn2": P6.5 R22.2 U14.7 | length 129
  Top Layer w0.3: U14.7@89.14,44.675 89.14,47.79 90.275,48.925 v1(91.025,48.925)
  Bottom Layer w0.3: P6.5@66.275,100.5 68.025,100.5 70.8,97.725 90.774,97.725 93.674,94.825 109.849,94.825 114.374,90.3 120.075,90.3 126.7,83.675 126.7,73.251 102.599,49.15 91.25,49.15 v1(91.025,48.925)
"CAN_L_U_battery conn1": P5.6 R21.1 U13.6 | length 147.8
  Top Layer w0.3: v1(83.05,50.375) 83.05,48.025 83.06,48.015 U13.6@83.06,44.675
  Bottom Layer w0.3: P5.6@50.425,95 51.8,96.375 62.8,96.375 63.725,95.45 63.725,94.275 64.725,93.275 64.725,92.326 65.777,91.274 69.649,91.274 70.7,92.325 81.175,92.325 83.225,94.375 90.151,94.375 98.076,86.45 120.15,86.45 123.6,83 123.6,74.5 101.05,51.95 84.625,51.95 ; v1(83.05,50.375) 84.6,51.925
"CAN_L_U_battery conn2": P6.6 R22.1 U14.6 | length 126.6
  Top Layer w0.25: v1(90.4,47.825) 90.41,47.815 U14.6@90.41,44.675
  Bottom Layer w0.3: P6.6@66.275,95 70.7,95 72.825,97.125 90.525,97.125 93.425,94.225 109.6,94.225 114.125,89.7 119.812,89.7 126.1,83.412 126.1,73.5 102.35,49.75 90.875,49.75 90.376,49.251 v1@90.376,47.849
CPLD0: U9.32 U11.69 | length 18.6
  Top Layer w0.3: U11.69@48.325,54.8 48.325,55.675 47.875,56.125 47.875,57.75 50.075,59.95 61.025,59.95 61.4,59.575 U9.32@61.4,58.725
CPLD1: U9.36 U11.64 | length 13.3
  Top Layer w0.3: v1(50.825,53.45) U11.64@50.825,54.8 ; U9.36@58.95,55.475 60.175,55.475 v1(60.45,55.2)
  Bottom Layer w0.3: v1(50.825,53.45) 52.575,55.2 v1(60.45,55.2)
CPLD2: U9.38 U11.62 | length 9.1
  Top Layer w0.3: U11.62@51.825,54.8 51.825,55.75 52.175,56.1 53.7,56.1 55.925,53.875 U9.38@58.95,53.875
CPLD3: U9.37 U11.63 | length 9.9
  Top Layer w0.3: U11.63@51.325,54.8 51.325,56.075 51.875,56.625 54.05,56.625 56,54.675 U9.37@58.95,54.675
CPLD4: U9.42 U11.73 | length 23
  Top Layer w0.3: U11.73@46.325,54.8 46.325,48.425 v1(46.375,48.375) ; U9.42@58.95,50.675 v1(60.475,50.675)
  Bottom Layer w0.3: v1(46.375,48.375) 58.175,48.375 v1(60.475,50.675)
CPLD5: U9.34 U11.70 | length 16.8
  Top Layer w0.3: U11.70@47.825,54.8 47.825,53.425 v1(47.925,53.325) ; U9.34@58.95,57.075 60.025,57.075 v1(60.275,56.825)
  Bottom Layer w0.3: v1(47.925,53.325) 51.5,56.9 60.2,56.9 v1(60.275,56.825)
CPLD6: U9.41 U11.72 | length 15.4
  Top Layer w0.3: U11.72@46.825,54.8 46.825,51.925 v1(46.95,51.8) ; v1(57.425,51.35) 57.55,51.475 U9.41@58.95,51.475
  Bottom Layer w0.3: v1(46.95,51.8) 46.925,51.825 52.925,51.825 53.4,51.35 v1(57.425,51.35)
CPLD7: U9.40 U11.71 | length 16.7
  Top Layer w0.3: U11.71@47.325,54.8 47.325,52.825 v1(47.5,52.65) ; U9.40@58.95,52.275 v1(60.375,52.275)
  Bottom Layer w0.3: v1(47.5,52.65) 60,52.65 v1(60.375,52.275)
CPLD8: U9.3 U11.49 | length 10.6
  Top Layer w0.25: U11.49@54.125,47.5 56.35,47.5 58.45,45.4 61.625,45.4 62.2,45.975 U9.3@62.2,47.425
CPLD9: U9.1 U11.54 | length 8.4
  Top Layer w0.3: U11.54@54.975,50 U11.54@54.125,50 55,50 55.45,49.55 55.85,49.55 57.975,47.425 U9.1@60.6,47.425
CPLD10: U9.2 U11.52 | length 9.9
  Top Layer w0.25: U11.52@54.125,49 55.625,49 58.775,45.85 61.025,45.85 61.4,46.225 U9.2@61.4,47.425
CPLD11: U9.43 U11.58 | length 9
  Top Layer w0.3: v1(52.6,51.125) 52.6,51.575 53.025,52 U11.58@54.125,52 ; v1(57.35,49.9) U9.43@58.925,49.9
  Bottom Layer w0.3: v1(52.6,51.125) 52.724,51.125 53.949,49.9 v1(57.35,49.9)
CPLD12: U9.44 U11.55 | length 9.1
  Top Layer w0.3: v1(52.65,50.35) 52.8,50.5 U11.55@54.125,50.5 U11.55@53.375,50.5 ; v1(57.35,49.05) U9.44@58.925,49.05
  Bottom Layer w0.3: v1(52.65,50.35) 53.95,49.05 v1(57.35,49.05)
CPLD13: U9.39 U11.61 | length 7.3
  Top Layer w0.3: U11.61@52.325,54.8 54.1,54.8 55.825,53.075 U9.39@58.95,53.075
CPLD_JTAG.TCK: P15.4 U9.11 | length 15.1
  Top Layer w0.25: U9.11@68.6,47.425 68.6,48.775 v1(68.65,48.825) ; v1(79.375,52.125) 79.381,52.119 P15.4@79.381,50.525
  Bottom Layer w0.25: v1(68.65,48.825) 69.55,48.825 71.55,50.825 73.55,50.825 74.05,51.325 78.575,51.325 v1(79.375,52.125)
CPLD_JTAG.TDI: P15.8 U9.9 | length 15
  Top Layer w0.25: U9.9@67,47.425 v1(67,49.45) ; v1(75.575,52.025) 76.5,52.025 76.844,51.681 ; v1(76.7,52.05) 76.844,51.906 76.844,51.681 ; P15.8@76.844,50.525 76.844,51.681
  Bottom Layer w0.25: v1(67,49.45) 69.225,49.45 72.175,52.4 74.875,52.4 75.25,52.025 v1(75.575,52.025)
CPLD_JTAG.TDO: P15.6 U9.24 | length 23.2
  Top Layer w0.25: v1(67.675,50.4) 67.4,50.675 67.4,56.5 67.8,56.9 U9.24@67.8,58.725 ; v1(77.169,52.981) 78.112,52.038 P15.6@78.112,50.525
  Bottom Layer w0.25: v1(67.675,50.4) 67.675,50.525 68.225,49.975 68.95,49.975 72.8,53.825 76.325,53.825 v1(77.169,52.981)
CPLD_JTAG.TMS: P15.2 U9.10 | length 17.6
  Top Layer w0.25: U9.10@67.8,47.425 67.8,48.725 v1(67.85,48.775) ; v1(80.625,52.025) 80.65,52 P15.2@80.65,50.525
  Bottom Layer w0.25: v1(67.85,48.775) 67.85,48.65 68.325,48.175 69.8,48.175 71.875,50.25 73.725,50.25 74.3,50.825 79.425,50.825 v1(80.625,52.025)
CURRENT: U11.80
DEBUG_UART.RXD: P14.2 U11.6 | length 21.8
  Top Layer w0.25: U11.6@41.025,50.5 42.087,50.5 42.162,50.425 42.638,50.425 42.713,50.5 v1(43.725,50.5)
  Bottom Layer w0.25: P14.2@26.2,52.785 29.315,52.785 32.325,49.775 43,49.775 v1(43.725,50.5)
DEBUG_UART.TXD: P14.3 U11.7 | length 21.3
  Top Layer w0.25: U11.7@41.025,50 43.225,50 43.45,49.775 43.8,49.775 43.802,49.773 v1(43.802,49.727)
  Bottom Layer w0.25: P14.3@26.2,50.245 27.395,49.05 43.125,49.05 v1(43.802,49.727)
EN1: Q9.1 U9.21 | length 9.4
  Top Layer w0.25: U9.21@70.25,56.275 71.475,56.275 71.725,56.525 74,56.525 74.925,57.45 77.425,57.45 Q9.1@78.625,58.65
EN2: U5.2 U9.19 | length 59.2
  Top Layer w0.3: v1(68.125,54.825) 68.275,54.675 U9.19@70.25,54.675 ; U5.2@102.32,77.15 v1(102.32,78.795)
  Bottom Layer w0.3: v1(68.125,54.825) 70.55,57.25 99.945,57.25 102.32,59.625 v1(102.32,78.795)
EN3: U5.4 U9.18 | length 60.9
  Top Layer w0.3: v1(68.2,53.875) U9.18@70.25,53.875 ; U5.4@104.36,77.15 v1(104.36,78.765)
  Bottom Layer w0.3: v1(68.2,53.875) 70.9,56.575 100.5,56.575 104.36,60.435 v1(104.36,78.765)
EN4: U4.2 U9.23 | length 48
  Top Layer w0.25: U9.23@68.6,58.725 v1(68.6,60.25)
  Top Layer w0.3: U4.2@91.62,77.15 v1(91.62,78.745)
  Bottom Layer w0.25: v1(68.6,60.25) 69.575,59.275 72.625,59.275 73.475,58.425 91.625,58.425 92.55,59.35 92.55,77.815 v1(91.62,78.745)
EN5: U4.4 U9.27 | length 51.6
  Top Layer w0.25: U9.27@65.4,58.725 65.4,59.9
  Top Layer w0.3: v1(93.65,78.7) 93.66,78.69 U4.4@93.66,77.15
  Bottom Layer w0.25: v1(65.625,60.125) 66.975,58.775 72.225,58.775 73.175,57.825 92.025,57.825 93.175,58.975 93.175,78.225 v1(93.65,78.7)